# Altium PCB 2.4.PcbDoc
Units mil, origin at the board's own origin, x right, y up, seen from the top; angles counter-clockwise.
Board outline 3815 x 3365 mil, 2 copper layers (Top Layer, Bottom Layer); 23 components, 34 nets, 115 pads, 8 vias.
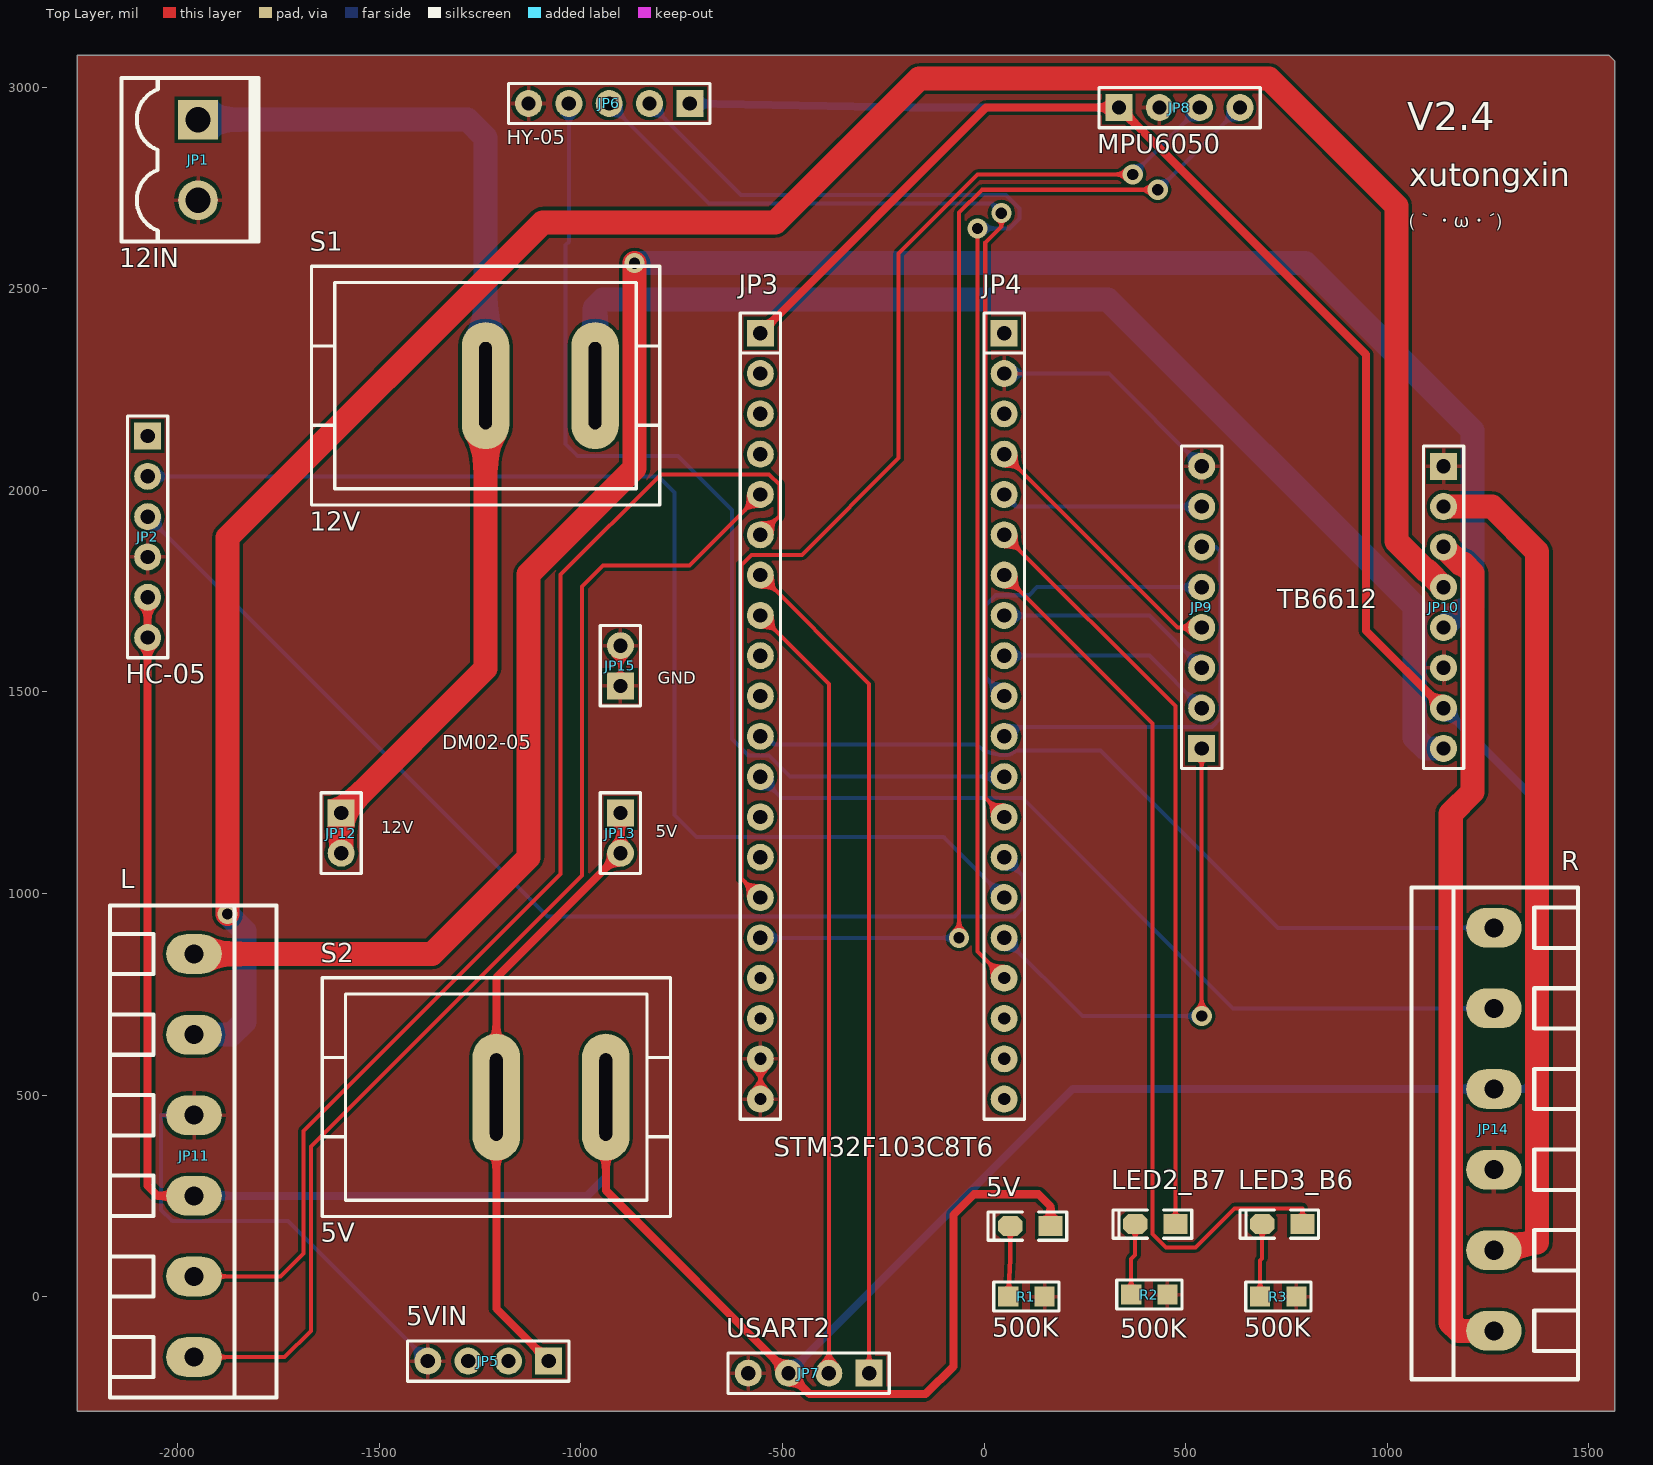
[diagram p0: Top Layer view]
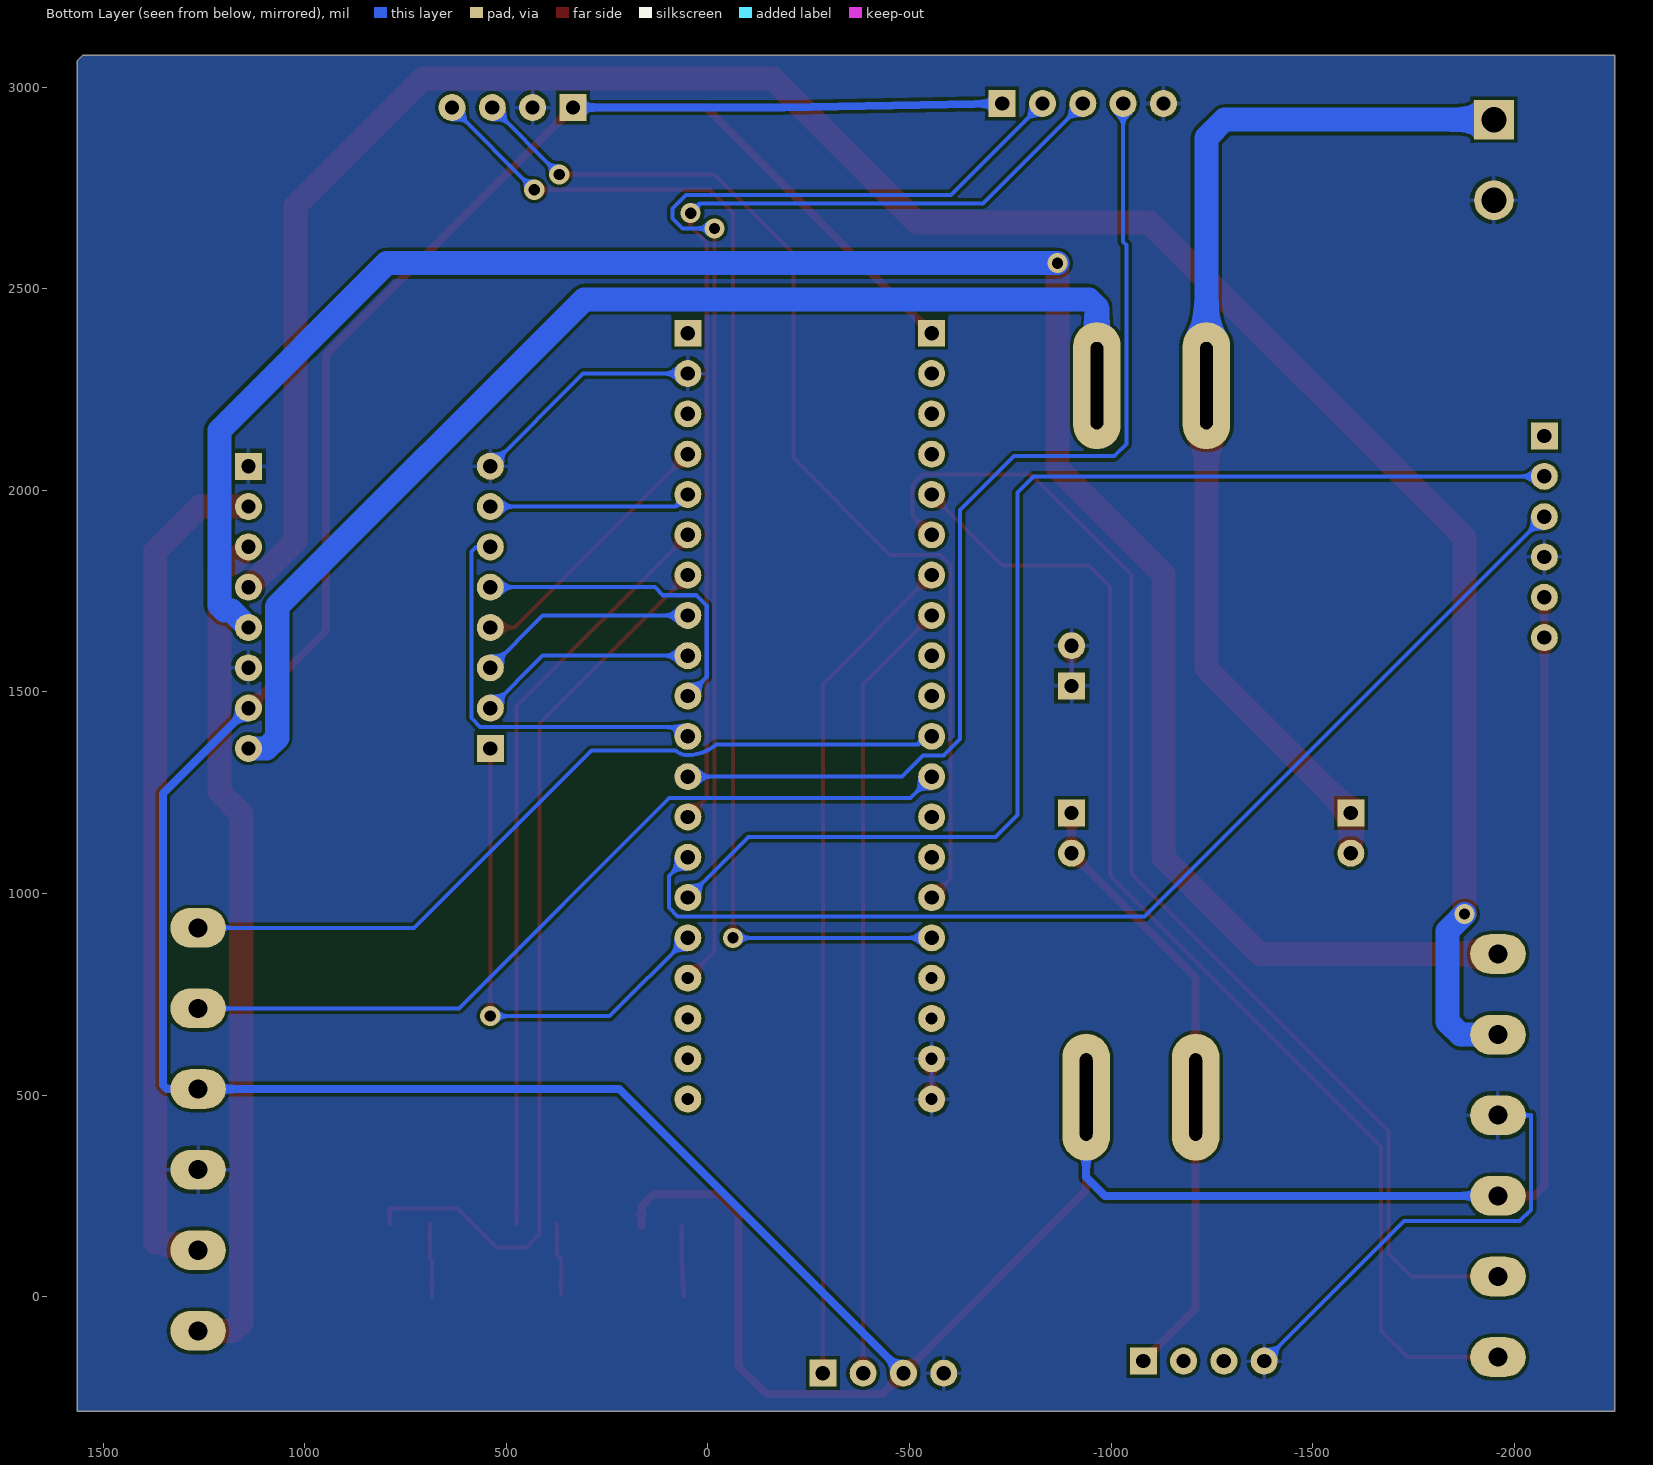
[diagram p1: Bottom Layer view, seen from below]

## Layer stack, top to bottom
Top Solder: solder mask 0.4, Solder Resist, Dk 3.5
Top Layer: signal copper 1.4
Dielectric 1: dielectric 12.6, FR-4, Dk 4.8
Bottom Layer: signal copper 1.4
Bottom Solder: solder mask 0.4, Solder Resist, Dk 3.5

## Board outline
-2250,-285 1565,-285 1565,3065.52 1550.52,3080 -2250,3080

## Design rules (kind name [scope] priority, off if disabled: settings)
Clearance [All] p1: gap=8 ignorepadtopadclearanceinfootprint=FALSE
DiffPairsRouting [All] p1: maxlimit=50 minlimit=30 mostfreqgap=40 toplayer_minwidth=15 toplayer_maxwidth=15 toplayer_prefwidth=15 bottomlayer_minwidth=15 bottomlayer_maxwidth=15 bottomlayer_prefwidth=15 maxuncoupledlength=500
PolygonConnect [All] p1: connectstyle=Relief reliefconductorwidth=10 reliefentries=4 polygonreliefangle="90 Angle" airgapwidth=10
RoutingCorners [All] p1: cornerstyle=45-Degree minsetback=120 maxsetback=120
RoutingVias [All] p1: holewidth=28 width=50 viastyle="Through Hole" minholewidth=28 minwidth=50 maxholewidth=28 maxwidth=50
SignalTopValue [All] p1: minimum=5.000
SilkToSilkClearance [All] p1: silktosilkclearance=0
SilkToSolderMaskClearance [IsPad] p1: minsilkscreentomaskgap=0 clearancetoexposedcopper=TRUE
SolderMaskExpansion [All] p1: expansion=4 istentingtop=FALSE
Width 12V [InNetClass('12v')] p1: maxlimit=60 minlimit=60 preferedwidth=60
Width 5V [InNetClass('5v')] p2: maxlimit=20 minlimit=20 preferedwidth=20
Width [All] p3: maxlimit=20 minlimit=10 preferedwidth=10
26 further rules are at their usual default settings.

## Classes and differential pairs
net class 12v: 12V 12V_IN A01 A02 B01 B02
net class 5v: 5V 5V_IN

## Components (designator, comment, footprint, x,y, rotation, side; value= is the part's Value field where it differs from the comment)
5V "绿色" "LED 0805G" 115,175 r180 top (schematic designator LED1)
JP1 "12IN" KF2EDGK5.08-LI-2P -1950,2820 r270 top
JP2 "HC-05" HDR2.54-M-LI-6P -2075,1885 r270 top
JP3 "STM32F103C8T6" HDR2.54-M-LI-20P -555,1440 r270 top
JP4 "HDR-1X20" HDR2.54-M-LI-20P 50,1440 r270 top
JP5 "5VIN" HDR2.54-M-LI-4P -1230,-160 r180 top
JP6 "HY-05" HDR2.54-M-LI-5P -930,2960 r180 top
JP7 "USART2" HDR2.54-M-LI-4P -435,-190 r180 top
JP8 "MPU6050" HDR2.54-M-LI-4P 485,2950 r0 top
JP9 "HDR-1X8" HDR2.54-M-LI-8P 540,1710 r90 top
JP10 "TB6612" HDR2.54-M-LI-8P 1140,1710 r270 top
JP11 "L" KF128-5.08-6P -1960,350 r270 top
JP12 "HDR-1X2" HDR2.54-M-LI-2P -1595,1150 r270 top
JP13 "HDR-1X2" HDR2.54-M-LI-2P -902.09,1150 r270 top
JP14 "R" KF128-5.08-6P 1265,415 r90 top
JP15 "DM02-05" HDR2.54-M-LI-2P -902.09,1565 r90 top
LED2_B7 "红色" "LED 0805G" 425,180 r180 top (schematic designator LED2)
LED3_B6 "红色" "LED 0805G" 740,180 r180 top (schematic designator LED3)
R1 "500K" "R 0805_M" 105,0 r0 top
R2 "500K" "R 0805_M" 410,5 r0 top
R3 "500K" "R 0805_M" 730,0 r0 top
S1 "12V" KCD1-101 -1236.65,2260 r0 top
S2 "5V" KCD1-101 -1210,495 r0 top

## Footprints (in the part's own frame and the unit in brackets; to place one, negate y for a bottom-side part, rotate by r counter-clockwise, add the part's x,y. Pads: shape width x height; smd on the part's side, far side on the other; paste and mask are expansions set on the pad)
HDR2.54-M-LI-2P [mm] "排母，2脚    淘宝ID:黄晶宝石   店铺网址:https://shop463601444.taobao.com"
  rect 1.7x1.7 hole 0.9: 1(-1.27,0)
  round 1.7 hole 0.9: 2(1.27,0)
  silkscreen extent -2.54,-1.27 2.54,1.27, body extent -2.54,-1.27 2.54,1.27, height 8.5
HDR2.54-M-LI-4P [mm] "排母，4脚  淘宝ID:黄晶宝石   店铺网址:https://shop463601444.taobao.com"
  rect 1.7x1.7 hole 0.9: 1(-3.81,0)
  round 1.7 hole 0.9: 2(-1.27,0) 3(1.27,0) 4(3.81,0)
  silkscreen extent -5.08,-1.27 5.08,1.27, body extent -5.08,-1.27 5.08,1.27, height 8.5
HDR2.54-M-LI-5P [mm] "排母，5脚   淘宝ID:黄晶宝石   店铺网址:https://shop463601444.taobao.com"
  rect 1.7x1.7 hole 0.9: 1(-5.08,0)
  round 1.7 hole 0.9: 2(-2.54,0) 3(0,0) 4(2.54,0) 5(5.08,0)
  silkscreen extent -6.35,-1.27 6.35,1.27, body extent -6.35,-1.27 6.35,1.27, height 8.5
HDR2.54-M-LI-6P [mm] "排母，6脚  淘宝ID:黄晶宝石   店铺网址:https://shop463601444.taobao.com"
  rect 1.7x1.7 hole 0.9: 1(-6.35,0)
  round 1.7 hole 0.9: 2(-3.81,0) 3(-1.27,0) 4(1.27,0) 5(3.81,0) 6(6.35,0)
  silkscreen extent -7.62,-1.27 7.62,1.27, body extent -7.62,-1.27 7.62,1.27, height 8.5
HDR2.54-M-LI-8P [mm] "排母，8脚"
  rect 1.7x1.7 hole 0.9: 1(-8.89,0)
  round 1.7 hole 0.9: 2(-6.35,0) 3(-3.81,0) 4(-1.27,0) 5(1.27,0) 6(3.81,0) 7(6.35,0) 8(8.89,0)
  silkscreen extent -10.16,-1.27 10.16,1.27, body extent -10.16,-1.27 10.16,1.27, height 8.5
HDR2.54-M-LI-20P [mm] "排母，20脚"
  rect 1.7x1.7 hole 0.9: 1(-24.13,0)
  round 1.7 hole 0.9: 2(-21.59,0) 3(-19.05,0) 4(-16.51,0) 5(-13.97,0) 6(-11.43,0) 7(-8.89,0) 8(-6.35,0) 9(-3.81,0) 10(-1.27,0) 11(1.27,0) 12(3.81,0) 13(6.35,0) 14(8.89,0) 15(11.43,0) 16(13.97,0)
  round 1.7 hole 0.762: 17(16.51,0) 18(19.05,0) 19(21.59,0) 20(24.13,0)
  silkscreen extent -25.4,-1.27 25.4,1.27, body extent -25.4,-1.27 25.4,1.27, height 8.5
KCD1-101 [mm] "船型开关立式      淘宝ID:黄晶宝石"
  oval 3x8 hole 0.8 slot 5.5 at 90 deg: 1(0,0) 2(6.9,0)
  silkscreen extent -10.97,-7.52 10.97,7.52, body extent -10.95,-7.5 10.95,7.5, height 20.3
KF2EDGK5.08-LI-2P [mm] "立插端子"
  rect 2.5x2.5 hole 1.6: 1(-2.54,0)
  round 2.5 hole 1.6: 2(2.54,0)
  silkscreen extent -5.16,-4.83 5.13,3.81, body extent -5.08,-4.75 5.08,3.75, height 11.25
KF128-5.08-6P [mm] "螺钉式接线端子，脚距5.08mm"
  oval 2.5x3.5 hole 1.2: 1(-12.7,0) 2(-7.62,0) 3(-2.54,0) 4(2.54,0) 5(7.62,0) 6(12.7,0)
  silkscreen extent -15.75,-5.31 15.24,5.21, body extent -15.74,-5.3 15.24,5.2, height 14.15
"LED 0805G" [mil] "绿色0805LED                              淘宝ID:黄晶宝石"
  rect 60x50 smd: 1(-50,0)
  oct 60x50 smd: 2(50,0)
  silkscreen extent -90,-35 105,35, body extent -39,-25 39,25, height 32
"R 0805_M" [mil] "1/8W贴片电阻"
  rect 50x50 smd: 1(-45,0) 2(45,0)
  silkscreen extent -81,-36 81,36, body extent -39,-25 39,25, height 20

## Part data
5V LED2_B7 LED3_B6: library part LED-SMD, "贴片LED", 学习资源=www.ooocke.com, 版权归属=源创客
  5V: BOM名称=电源指示
  LED2_B7 LED3_B6: BOM名称=贴片LED
JP1 JP12 JP13 JP15: library part "Header 2", "2P接插件"
  JP1: BOM名称=12V进入, 学习资源=www.ooocke.com, 版权归属=源创客
  JP12: BOM名称=DM02-2, 版权归属="封装库来自淘宝 ID：黄晶宝石", 联系售后=https://shop463601444.taobao.com
  JP13: BOM名称=DM02-1, 版权归属="封装库来自淘宝 ID：黄晶宝石", 联系售后=https://shop463601444.taobao.com
  JP15: BOM名称=DM02-3, 版权归属="封装库来自淘宝 ID：黄晶宝石", 联系售后=https://shop463601444.taobao.com
JP2 JP11 JP14: library part "Header 6", "6P接插件"
  JP2: BOM名称=HC-05, 学习资源=https://shop463601444.taobao.com, 版权归属="封装库来自淘宝 ID：黄晶宝石"
  JP11: BOM名称=左电机, 学习资源=www.ooocke.com, 版权归属=源创客
  JP14: BOM名称=右电机, 学习资源=www.ooocke.com, 版权归属=源创客
JP3 JP4: library part "Header 20", "20P接插件", 学习资源=https://shop463601444.taobao.com, 版权归属="封装库来自淘宝 ID：黄晶宝石"
  JP3: BOM名称=stm32-P3
  JP4: BOM名称=stm32-P4
JP5 JP7 JP8: library part "Header 4", "4P接插件", 学习资源=https://shop463601444.taobao.com, 版权归属="封装库来自淘宝 ID：黄晶宝石"
  JP5: BOM名称=USB-C
  JP7: BOM名称=USART2
  JP8: BOM名称=6050
JP6: library part "Header 5", "5P接插件", BOM名称=5P接插件, 学习资源=https://shop463601444.taobao.com, 版权归属="封装库来自淘宝 ID：黄晶宝石"
JP9 JP10: library part "Header 8", "8P接插件", 学习资源=https://shop463601444.taobao.com, 版权归属="封装库来自淘宝 ID：黄晶宝石"
  JP9: BOM名称=TB6612接插件1
  JP10: BOM名称=TB6612接插件2
R1 R2 R3: library part R, "贴片电阻", BOM名称=贴片电阻, 版权归属="来自淘宝 ID：黄晶宝石", 联系售后=https://shop463601444.taobao.com
  R2: ComponentLink1Description="New link"
S1 S2: library part KCD1-101, "1路单刀船型开关", BOM名称=1路单刀船型开关, 学习资源=www.ooocke.com, 版权归属="封装库来自淘宝 ID：黄晶宝石"

## Via types
v1: diameter 50, hole 28, Top Layer to Bottom Layer, 8 vias

## Nets (pads, with @x,y where several pads share a name; then routed paths per layer and width w, separated by ;. In a path a pad name is that pad's centre, name@x,y a point inside that pad or via, vN(x,y) a via of type N, cw(c..) or ccw(c..) an arc to the next point about the centre after c; other vN are vias at no path point)
5V: 5V.1 JP2.5 JP2.6 JP3.1 JP6.1 JP7.3 JP8.1 JP10.7 JP11.4 JP14.4 S2.2 | length 12022.6
  Top Layer w20: JP2.5 JP2.6 -2075,275 -2050,250 JP11.4 ; S2.2 -938.35,263.35 JP7.3 -433,-242 -145,-242 -76,-173 -76,203 -25,254 135,254 165,224 5V.1 ; JP3.1 5,2950 JP8.1 948,2337 948,1652 JP10.7
  Bottom Layer w20: JP11.4 -985,250 -938.35,296.65 S2.2 ; JP6.1 -187,2950 JP8.1 ; JP7.3 220,515 JP14.4 1342,515 1352,525 1352,1248 JP10.7
5V_IN: JP5.1 JP13.1 JP13.2 S2.1 | length 1541.4
  Top Layer w20: JP5.1 -1210,-30 S2.1 -1210,792.09 JP13.2 JP13.1
12V: JP10.8 S1.2 | length 2959.7
  Bottom Layer w60: S1.2 -965,2454 -945,2474 307,2474 1068.53,1712.47 1068.53,1386.47 1095,1360 JP10.8
12V_IN: JP1.1 JP12.1 JP12.2 S1.1 | length 2655.4
  Top Layer w60: JP12.2 JP12.1 -1236.65,1558.35 S1.1
  Bottom Layer w60: JP1.1 -1281.65,2920 -1236.65,2875 S1.1
A01: JP10.5 JP11.1 | length 5292.3
  Top Layer w60: JP11.1 -1369.47,850 -1130,1089.47 -1130,1792 -867,2055 v1(-867,2564)
  Bottom Layer w60: v1(-867,2564) 797,2564 1212,2149 1212,1715 1199,1702 1182,1702 JP10.5
A02: JP10.4 JP11.2 | length 5855.6
  Top Layer w60: v1(-1877,949) -1877,1883 -1095,2665 -518,2665 -161,3022 707,3022 1023,2706 1023,1874 1095,1802 1098,1802 JP10.4
  Bottom Layer w60: JP11.2 -1867,650 -1835,682 -1835,907 v1(-1877,949)
AIN1: JP4.8 JP9.3 | length 543.8
  Bottom Layer w10: JP4.8 410,1690 JP9.3
AIN2: JP4.9 JP9.2 | length 543.8
  Bottom Layer w10: JP4.9 410,1590 JP9.2
B01: JP10.3 JP14.1 | length 2096.6
  Top Layer w60: JP10.3 1182,1818 1189,1818 1212,1795 1212,1252 1158,1198 1158,-65 1178,-85 JP14.1
B02: JP10.2 JP14.2 | length 2100.2
  Top Layer w60: JP10.2 1260,1960 1372,1848 1372,135 JP14.2
BIN1: JP4.10 JP9.5 | length 800.1
  Bottom Layer w10: JP4.10 3,1537 3,1715 28,1740 111,1740 131,1760 JP9.5
BIN2: JP4.11 JP9.6 | length 1020.6
  Bottom Layer w10: JP4.11 73,1413 565,1413 587,1435 587,1848 575,1860 JP9.6
BRX: JP2.2 JP4.15 | length 3026.5
  Bottom Layer w10: JP2.2 -808,2035 -768,1995 -768,1195 -713,1140 -100,1140 JP4.15
BTX: JP2.3 JP4.14 | length 2736.5
  Bottom Layer w10: JP2.3 -1083,943 75,943 97,965 97,1043 JP4.14
GND: JP1.2 JP2.4 JP3.19 JP3.20 JP4.2 JP5.4 JP6.5 JP7.4 JP8.2 JP9.8 JP10.1 JP10.6 JP11.3 JP14.3 JP15.1 JP15.2 R1.2 R2.2 R3.2 | length 1919.6
  Top Layer w10: JP15.1 JP15.2 ; JP3.20 JP3.19
  Bottom Layer w10: JP11.3 -2042,450 -2042,215 -2014,187 -1727,187 JP5.4 ; JP4.2 310,2290 JP9.8
HYIN: JP4.13 JP6.3 | length 2619.7
  Top Layer w10: v1(43,2688) 43,2654.87 3,2614.87 3,1237 JP4.13
  Bottom Layer w10: JP6.3 -682.29,2712.29 18.71,2712.29 v1(43,2688)
HYOUT: JP4.12 JP6.4 | length 2610.8
  Bottom Layer w10: JP6.4 -1030,2617 -1038,2609 -1038,2115 -1008,2085 -759,2085 -625,1951 -625,1383 -585,1343 -534,1343 -481,1290 JP4.12
HYRUN: JP4.17 JP6.2 | length 3052.4
  Top Layer w10: v1(-16,2650) -16,856 JP4.17
  Bottom Layer w10: JP6.2 -603,2733 55,2733 88,2700 88,2675 63,2650 v1(-16,2650)
L2_B7: JP4.6 LED2_B7.1 | length 1886
  Top Layer w10: JP4.6 475,1465 LED2_B7.1
L3_B6: JP4.7 LED3_B6.1 | length 2252.3
  Top Layer w10: JP4.7 418,1422 418,155 451,122 524,122 621,219 790,219 LED3_B6.1
LA: JP3.5 JP11.6 | length 2979.1
  Top Layer w10: JP11.6 -1735,-150 -1670,-85 -1670,372 -997,1045 -997,1762 -945,1814 -731,1814 JP3.5
LB: JP3.6 JP11.5 | length 3044.4
  Top Layer w10: JP11.5 -1745,50 -1688,107 -1688,411 -1051,1048 -1051,1791 -802,2040 -533,2040 -508,2015 -508,1937 JP3.6
NetLED1_2: 5V.2 R1.1 | length 175.1
  Top Layer w10: R1.1 65,93 5V.2
NetLED2_2: LED2_B7.2 R2.1 | length 179.1
  Top Layer w10: R2.1 365,93 375,103 LED2_B7.2
NetLED3_2: LED3_B6.2 R3.1 | length 182.1
  Top Layer w10: R3.1 685,90 690,95 LED3_B6.2
PWMA-PA8: JP4.16 JP9.1 | length 1234.4
  Top Layer w10: v1(540,696) JP9.1
  Bottom Layer w10: JP4.16 244,696 v1(540,696)
PWMB-PB8: JP4.5 JP9.7 | length 502.4
  Bottom Layer w10: JP4.5 80,1960 JP9.7
RA: JP3.11 JP14.6 | length 2019.8
  Bottom Layer w10: JP3.11 -540.68,1390 -520.68,1370 -20.55,1370 ccw(c50,1450.79) 50,1343.54 ccw(c50,1390) 80.56,1355 289,1355 291.93,1352.07 729,915 JP14.6
RB: JP3.12 JP14.5 | length 2058.2
  Bottom Layer w10: JP3.12 -502,1237 96,1237 618,715 JP14.5
SCL2: JP3.15 JP8.3 | length 2749
  Top Layer w10: JP3.15 -602,1037 -602,1815 -577,1840 -452,1840 -212,2080 -212,2587.68 -15.68,2784 v1(369,2784)
  Bottom Layer w10: v1(369,2784) JP8.3
SDA2: JP3.16 JP8.4 | length 3097.1
  Top Layer w10: v1(-62,890) -62,2689 -5,2746 v1(431,2746)
  Bottom Layer w10: JP3.16 v1(-62,890) ; v1(431,2746) JP8.4
STBY: JP4.4 JP9.4 | length 668.1
  Top Layer w10: JP4.4 480,1660 JP9.4
USART2_RX: JP3.8 JP7.2 | length 1950.4
  Top Layer w10: JP3.8 -385,1520 JP7.2
USART2_TX: JP3.7 JP7.1 | length 2091.8
  Top Layer w10: JP3.7 -285,1520 JP7.1
pads on no net: JP2.1 JP3.2 JP3.3 JP3.4 JP3.9 JP3.10 JP3.13 JP3.14 JP3.17 JP3.18 JP4.1 JP4.3 JP4.18 JP4.19 JP4.20 JP5.2 JP5.3

## Polygon pours and split planes (outlines as drawn)
GND on Top Layer "GND_L01_P000" (solid, remove dead copper, pour order 0): -2250,3080 -2250,-285 1565,-285 1565,3065 1550,3080
GND on Bottom Layer "GND_L02_P001" (solid, remove dead copper, pour order 1): -2250,3080 -2250,-285 1565,-285 1565,3065 1550,3080

## Silkscreen, mask and mechanical layers (free items; w line width, h text height)
Top Overlay:
  text "V2.4" at 1050,2870 h120
  text "xutongxin" at 1055,2735 h100
  text "(｀・ω・´)" at 1055,2640.05 h60
  text "GND" at -810,1520 h30
  text "12V" at -1495,1150 h30
  text "5V" at -815,1140 h30
Mechanical 1:
  lines w10: -2250,-285 1565,-285 1565,2270 1565,3065.52 1550.52,3080 -2250,3080 -2250,-285